# EAGLE board UpTo11.MotherBoard (EAGLE 7.6.0)

Size 68 x 58 mm. Coordinates in mm from the lower left corner, seen from the top.
Outline: 0,0 68,0 68,58 0,58 0,0
Copper layers (1*16): Top 0.035mm / dielectric 1.5mm / Bottom 0.035mm
Design rules "default": minimum track width 10mil, minimum drill 24mil, track to track 8mil, track to pad 8mil, pad to pad 8mil, via to via 8mil, smd to smd 8mil, copper to edge 40mil, drill to drill 8mil, minimum pad ring 10mil, minimum via ring 8mil, stop-mask expansion 4mil, vias tented up to drill 0mil, thermal gap 10mil
Holes 4 mm at 8,48 8,8 58,48 58,8

## Footprints (pad centres in the part's own frame; a part is rotated, then mirrored left to right if it is on the bottom)
TO92 = drill 0.813 octagon: 1 1.27,0; 2 0,1.905; 3 -1.27,0
C025-030X050 = drill 0.813 pad 1.422 octagon: 1 -1.27,0; 2 1.27,0
1X06 = drill 1.016 octagon: 1 -6.35,0; 2 -3.81,0; 3 -1.27,0; 4 1.27,0; 5 3.81,0; 6 6.35,0
0207/10 = drill 0.813 pad 1.676 octagon: 1 -5.08,0; 2 5.08,0
MOLEX_480371000 = smd 1.2 x 2: 1 3.5,2.6; 2 1,2.6; 3 -1,2.6; 4 -3.5,2.6 | drill 2.5: M1 -5.7,0; M2 5.7,0 | hole 1.1: -2.25,0; 2.25,0

## Placement (x,y rotation side)
2N3904_NPN  2N3904  [TO92]  58,38 270 top
2N3906_PNP  2N3906  [TO92]  12.1,38 90 top
CAP_100UF  [C025-030X050]  35,36 0 top
FRONT_PANEL_INTERFACE  [1X06]  35,56 0 top
R_1M_O  [0207/10]  20,18 90 top
R_22_O  [0207/10]  40,18 270 top
R_100_O  [0207/10]  30,18 90 top
R_PWR_LED_1K  [0207/10]  50,18 270 top
X1  USB-A  [MOLEX_480371000]  34,2.5 0 top

## Library data of the parts
2N3904_NPN = transistor
2N3906_PNP = transistor-pnp
CAP_100UF FRONT_PANEL_INTERFACE R_1M_O R_22_O R_100_O R_PWR_LED_1K X1 = adafruit

## Nets
GND_EX: FRONT_PANEL_INTERFACE.1 R_1M_O.1 X1.4
LED_FLASH: 2N3904_NPN.3 FRONT_PANEL_INTERFACE.4
LED_PWR: FRONT_PANEL_INTERFACE.3 R_PWR_LED_1K.1
N$2: 2N3904_NPN.1 CAP_100UF.2 R_22_O.1
N$5: 2N3906_PNP.2 CAP_100UF.1 R_1M_O.2
N$6: 2N3906_PNP.1 R_100_O.1
POT_IN: FRONT_PANEL_INTERFACE.5 R_100_O.2
POT_OUT: 2N3904_NPN.2 FRONT_PANEL_INTERFACE.6
VCC: 2N3906_PNP.3 FRONT_PANEL_INTERFACE.2 R_22_O.2 R_PWR_LED_1K.2 X1.1

## Tracks (layer width: path | path; a pad name or v marks a point on that pad's centre or on a via)
GND_EX  (2 unrouted)
LED_FLASH  (1 unrouted)
LED_PWR  (1 unrouted)
N$2  (2 unrouted)
N$5  (2 unrouted)
N$6  (1 unrouted)
POT_IN  (1 unrouted)
POT_OUT  (1 unrouted)
VCC  (4 unrouted)

## Text on the board
tNames: GND | VCC | POT_IN | LED_PWR | POT_OUT | LED_FLASH | Up To 11 - Mother Board | www.FredericTorres.com | bit.ly/38Kq3UG
bNames: Up To 11 - MotherBoard | https://bit.ly/38Kq3UG | MadeInTheUSB.net | www.FredericTorres.com | PCBv1 - 2019.12